# EAGLE board BLT_Preliminary_Avionics_Schematic_Brandon (EAGLE 9.6.2)
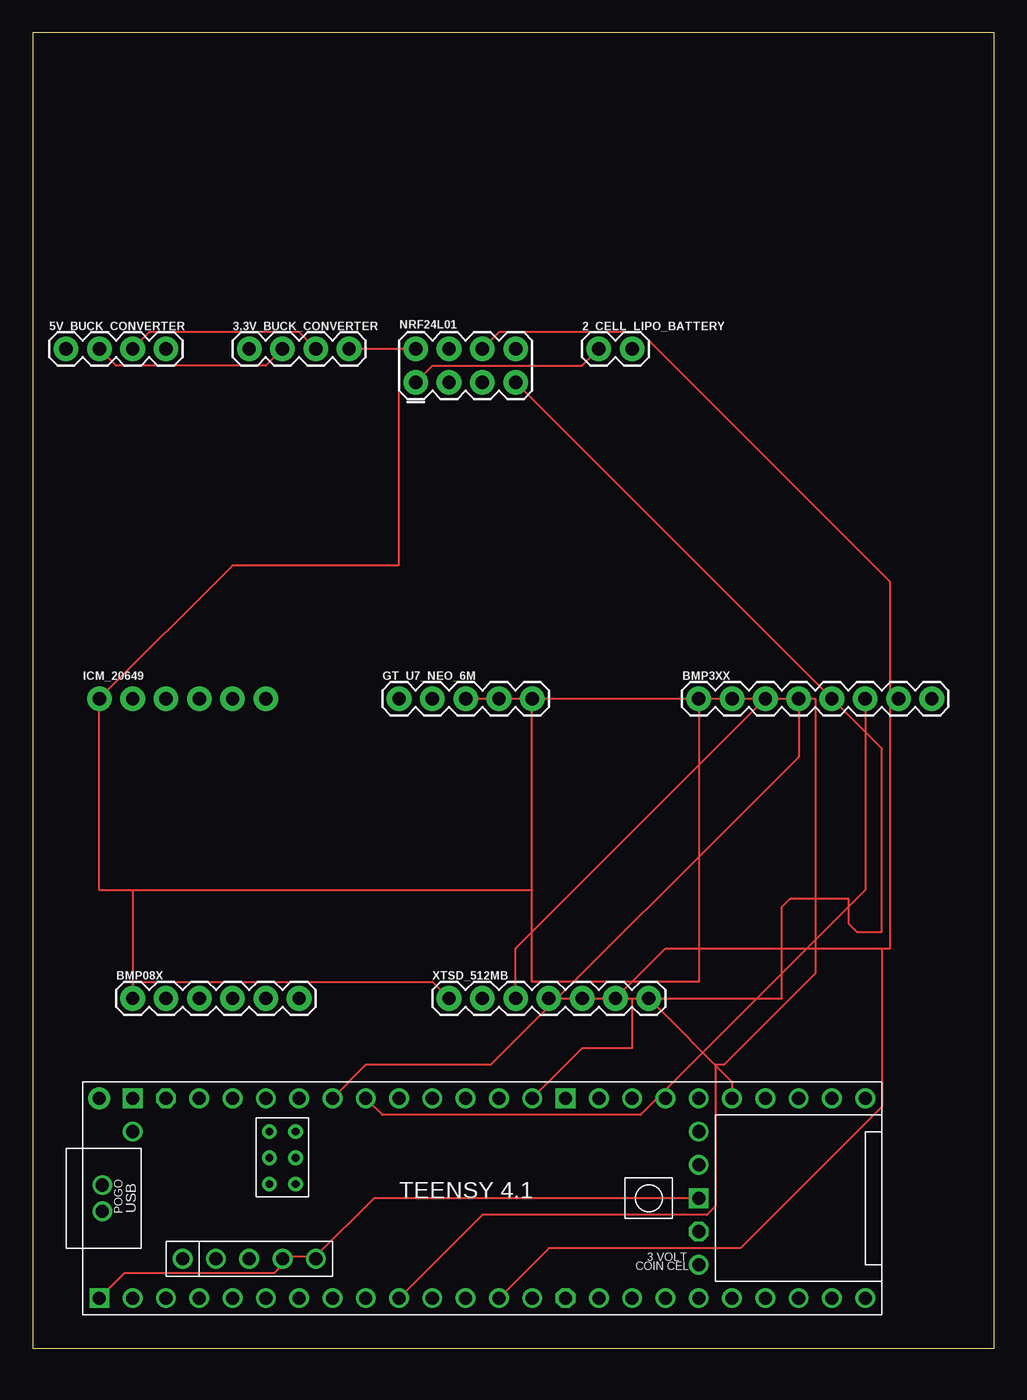
[diagram p0: board, top side]
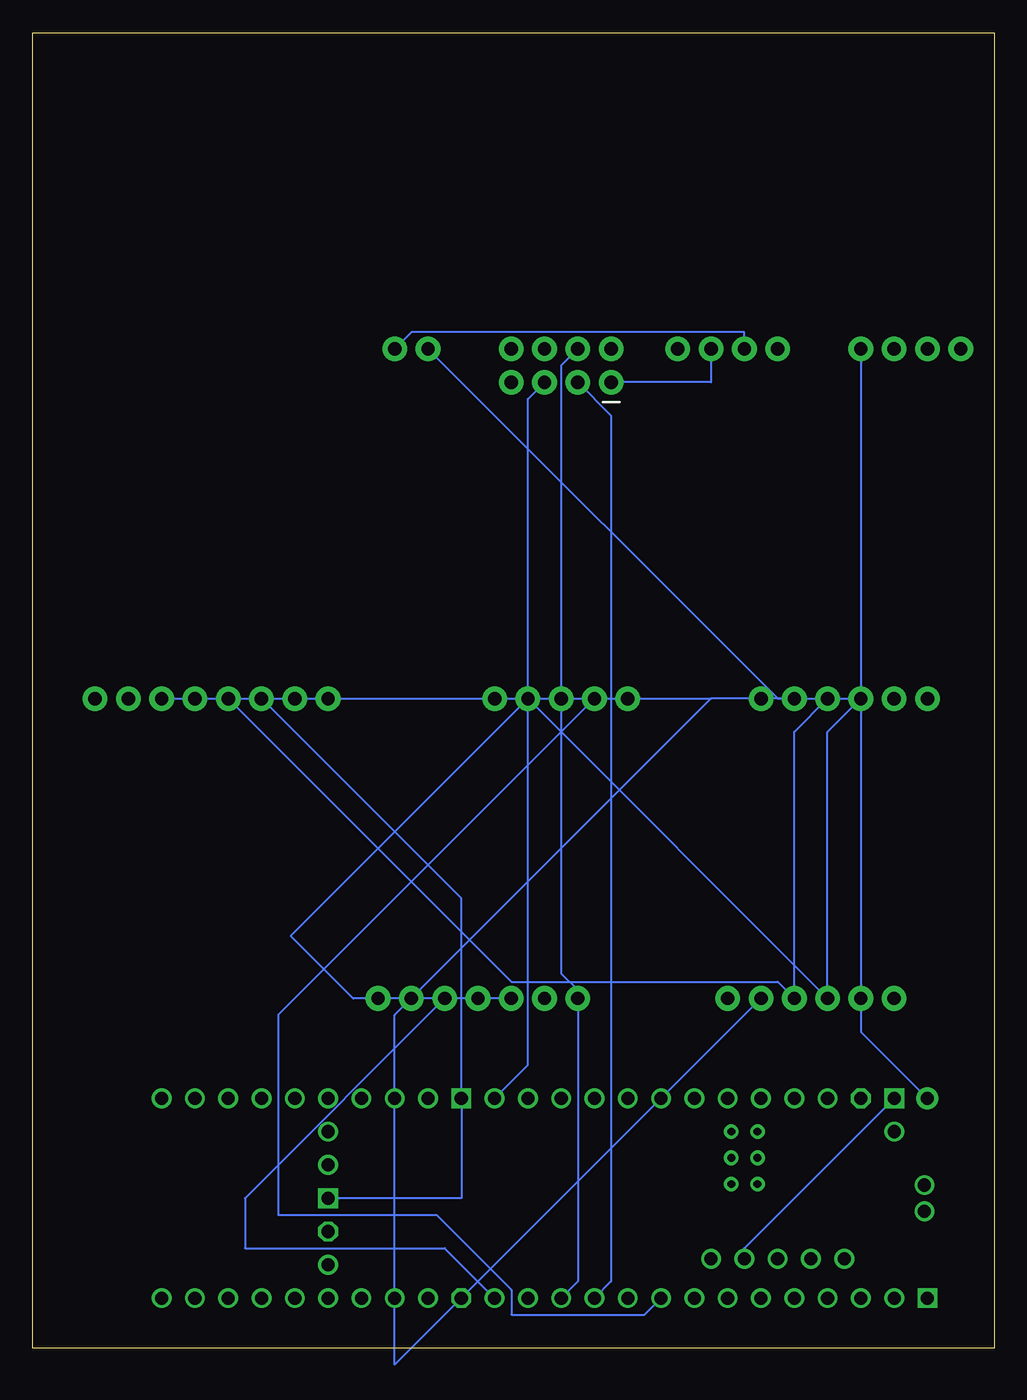
[diagram p1: board, bottom side, seen from below]

Size 73.33 x 100.32 mm. Coordinates in mm from the lower left corner, seen from the top.
Outline: 0,0 73.33,0 73.33,100.32 0,100.32 0,0
Copper layers (1*16): Top 0.035mm / dielectric 1.5mm / Bottom 0.035mm
Design rules "default": minimum track width 6mil, minimum drill 0.35mm, track to track 6mil, track to pad 6mil, pad to pad 6mil, via to via 6mil, smd to smd 6mil, copper to edge 40mil, drill to drill 6mil, minimum pad ring 10mil, minimum via ring 8mil, stop-mask expansion 4mil, vias tented up to drill 0mil, thermal gap 10mil

## Footprints (pad centres in the part's own frame; a part is rotated, then mirrored left to right if it is on the bottom)
1X02 = drill 1.016 pad 1.88: 1 0,0; 2 2.54,0
1X04 = drill 1.016 pad 1.88: 1 0,0; 2 2.54,0; 3 5.08,0; 4 7.62,0
1X08 = drill 1.016 pad 1.88: 1 0,0; 2 2.54,0; 3 5.08,0; 4 7.62,0; 5 10.16,0; 6 12.7,0; 7 15.24,0; 8 17.78,0
1X06 = drill 1.016 pad 1.88: 1 0,0; 2 2.54,0; 3 5.08,0; 4 7.62,0; 5 10.16,0; 6 12.7,0
1X05 = drill 1.016 pad 1.88: 1 0,0; 2 2.54,0; 3 5.08,0; 4 7.62,0; 5 10.16,0
1X06_NO_SILK = drill 1.016 pad 1.88: 1 0,0; 2 2.54,0; 3 5.08,0; 4 7.62,0; 5 10.16,0; 6 12.7,0
2X4 = drill 1.016 pad 1.88: 1 -3.81,-1.27; 2 -3.81,1.27; 3 -1.27,-1.27; 4 -1.27,1.27; 5 1.27,-1.27; 6 1.27,1.27; 7 3.81,-1.27; 8 3.81,1.27
TEENSY41 = drill 1: 0-RX1/CS1/CRX2 -27.94,-7.62; 1-TX1/MISO1/CTX2 -25.4,-7.62; 2-OUT2 -22.86,-7.62; 3-LRCLK2 -20.32,-7.62; 4-BCLK2 -17.78,-7.62; 5-IN2 -15.24,-7.62; 6-OUT1D -12.7,-7.62; 7-RX2/OUT1A -10.16,-7.62; 8-TX2/IN1 -7.62,-7.62; 9-OUT1C -5.08,-7.62; 10-CS\MQSR -2.54,-7.62; 11-MOSI/CTX1 0,-7.62; 12-MISO/MQSL 2.54,-7.62; 13-SCK/LED 2.54,7.62; 14-A0/TX3/SPDIF_OUT 0,7.62; 15-A1/RX3/SPDIF_IN -2.54,7.62; 16-A2/RX4/SCL1 -5.08,7.62; 17-A3/TX4/SDA1 -7.62,7.62; 18-A4/SDA0 -10.16,7.62; 19-A5/SCL0 -12.7,7.62; 20-A6/TX5/LRCLK1 -15.24,7.62; 21-A7/RX5/BCLK1 -17.78,7.62; 22-A8/CTX1 -20.32,7.62; 23-A9/CRX1/MCLK1 -22.86,7.62; 24-A10/TX6/SCL2 7.62,-7.62; 25-A11/RX6/SDA2 10.16,-7.62; 26-A12/MOSI1 12.7,-7.62; 27-A13/SCK1 15.24,-7.62; 28-RX7 17.78,-7.62; 29-TX7 20.32,-7.62; 30-CRX3 22.86,-7.62; 31-CTX3 25.4,-7.62; 32-OUT1B 27.94,-7.62; 33-MCLK2 27.94,7.62; 34-RX8 25.4,7.62; 35-TX8 22.86,7.62; 36-PWM 20.32,7.62; 37-PWM 17.78,7.62; 38-A14/CS/IN1 15.24,7.62; 39-A15/CS/OUT1A 12.7,7.62; 40-A16/CS1 10.16,7.62; 41-A17/MISO1 7.62,7.62; +5V -24.13,-4.62; D+ -30.25,-1; D- -30.25,1; DM -21.59,-4.62; DP -19.05,-4.62; GND4 -16.51,-4.62; GND5 -13.97,-4.62; ON/OFF 15.24,5.08; PROGRAM 15.24,2.54; VBAT 15.24,-5.08; VUSB -27.94,5.08 | drill 1 octagon: 3V3-1 5.08,-7.62; 3V3-2 15.24,-2.54; 3V3-3 -25.4,7.62 | drill 0.6: G -15.51,3.08; LED -17.51,3.08; R+ -17.51,5.08; R- -15.51,5.08; T+ -15.51,1.08; T- -17.51,1.08 | drill 1 square: GND1 -30.48,-7.62; GND2 15.24,0; GND3 5.08,7.62; GND6 -27.94,7.62 | drill 1 pad 1.676: VIN -30.48,7.62
1X07 = drill 1.016 pad 1.88: 1 0,0; 2 2.54,0; 3 5.08,0; 4 7.62,0; 5 10.16,0; 6 12.7,0; 7 15.24,0

## Placement (x,y rotation side)
2_CELL_LIPO_BATTERY  [1X02]  43.18,76.2 0 top
3.3V_BUCK_CONVERTER  [1X04]  16.51,76.2 0 top
5V_BUCK_CONVERTER  [1X04]  2.54,76.2 0 top
BMP3XX  [1X08]  50.8,49.53 0 top
BMP08X  [1X06]  7.62,26.67 0 top
GT_U7_NEO_6M  [1X05]  27.94,49.53 0 top
ICM_20649  [1X06_NO_SILK]  5.08,49.53 0 top
NRF24L01  [2X4]  33.02,74.93 0 top
U$1  TEENSY41  [TEENSY41]  35.56,11.43 0 top
XTSD_512MB  [1X07]  31.75,26.67 0 top

## Library data of the parts
2_CELL_LIPO_BATTERY GT_U7_NEO_6M ICM_20649 NRF24L01 XTSD_512MB = SparkFun-Connectors
3.3V_BUCK_CONVERTER 5V_BUCK_CONVERTER = SparkFun-Connectors; PROD_ID: CONN-09696
BMP3XX = SparkFun-Connectors; PROD_ID: CONN-08438
BMP08X = SparkFun-Connectors; PROD_ID: CONN-08437
U$1 = teensy

## Nets
3.3V: 3.3V_BUCK_CONVERTER.4 BMP3XX.1 BMP08X.1 GT_U7_NEO_6M.5 ICM_20649.1 NRF24L01.2 XTSD_512MB.1
5V: 5V_BUCK_CONVERTER.4 U$1.VIN
BAT+: 2_CELL_LIPO_BATTERY.2 3.3V_BUCK_CONVERTER.2 5V_BUCK_CONVERTER.2
CE: NRF24L01.3 U$1.9-OUT1C
CS: U$1.37-PWM XTSD_512MB.7
CSN: NRF24L01.4 U$1.10-CS\MQSR
GND: 2_CELL_LIPO_BATTERY.1 3.3V_BUCK_CONVERTER.3 5V_BUCK_CONVERTER.3 BMP3XX.3 BMP08X.3 GT_U7_NEO_6M.4 ICM_20649.3 NRF24L01.1 U$1.GND1 U$1.GND2 U$1.GND3 U$1.GND4 U$1.GND5 U$1.GND6 XTSD_512MB.3
MISO: NRF24L01.7 U$1.12-MISO/MQSL XTSD_512MB.5
MOSI: NRF24L01.6 U$1.11-MOSI/CTX1 XTSD_512MB.6
N$2: ICM_20649.2
N$3: BMP3XX.2
N$4: BMP08X.2
N$6: ICM_20649.6
N$7: BMP3XX.5
N$9: BMP3XX.7
N$10: BMP3XX.8
N$12: BMP08X.6
RX2: GT_U7_NEO_6M.2 U$1.7-RX2/OUT1A
SCK: NRF24L01.5 U$1.13-SCK/LED XTSD_512MB.4
SCL: BMP3XX.4 BMP08X.4 ICM_20649.4 U$1.19-A5/SCL0
SDA: BMP3XX.6 BMP08X.5 ICM_20649.5 U$1.18-A4/SDA0
TX2: GT_U7_NEO_6M.3 U$1.8-TX2/IN1

## Tracks (layer width: path | path; a pad name or v marks a point on that pad's centre or on a via)
3.3V
  Top 0.152: NRF24L01.2 27.94,76.2 | 27.94,76.2 3.3V_BUCK_CONVERTER.4 | 7.62,27.94 BMP08X.1 | BMP3XX.1 50.8,27.94 38.1,27.94 38.1,34.92 | 7.62,27.94 30.48,27.94 XTSD_512MB.1 | 38.1,34.92 GT_U7_NEO_6M.5 | 7.62,34.92 5.08,34.92 ICM_20649.1 15.24,59.69 27.94,59.69 27.94,76.2 | 7.62,34.92 38.1,34.92 | 7.62,34.92 7.62,27.94
5V
  Bottom 0.152: U$1.VIN 10.16,24.13 5V_BUCK_CONVERTER.4
BAT+
  Top 0.152: 5V_BUCK_CONVERTER.2 6.35,74.93 17.78,74.93 3.3V_BUCK_CONVERTER.2
  Bottom 0.152: 2_CELL_LIPO_BATTERY.2 44.45,77.47 19.05,77.47 3.3V_BUCK_CONVERTER.2
CE
  Bottom 0.152: U$1.9-OUT1C 29.21,5.08 29.21,71.12 NRF24L01.3
CS
  Top 0.152: U$1.37-PWM 53.34,20.32 XTSD_512MB.7
CSN
  Bottom 0.152: U$1.10-CS\MQSR 31.75,5.08 31.75,27.3 33.02,28.57 33.02,74.93 NRF24L01.4
GND
  Top 0.152: 5V_BUCK_CONVERTER.3 8.89,77.47 20.32,77.47 3.3V_BUCK_CONVERTER.3 | 2_CELL_LIPO_BATTERY.1 41.91,74.93 30.48,74.93 NRF24L01.1 | U$1.GND1 6.99,5.71 18.41,5.71 19.05,6.35 U$1.GND4 19.05,6.99 21.59,6.99 | XTSD_512MB.3 36.83,30.48 BMP3XX.3 | 21.59,6.99 26.04,11.43 U$1.GND2 | 21.59,6.99 U$1.GND5
  Bottom 0.152: NRF24L01.1 21.59,73.66 3.3V_BUCK_CONVERTER.3 | U$1.GND6 19.05,7.62 U$1.GND4 | U$1.GND2 40.64,11.43 U$1.GND3 40.64,34.29 BMP3XX.3 GT_U7_NEO_6M.4 | GT_U7_NEO_6M.4 BMP08X.3 12.7,46.99 ICM_20649.3 16.51,49.53 2_CELL_LIPO_BATTERY.1 | GT_U7_NEO_6M.4 53.66,31.43 48.9,26.67 XTSD_512MB.3
MISO
  Top 0.152: NRF24L01.7 64.77,45.72 64.77,31.75 62.87,31.75 62.23,32.38 62.23,34.29 57.78,34.29 57.15,33.66 57.15,26.67 XTSD_512MB.5
  Bottom 0.152: U$1.12-MISO/MQSL 41.91,7.62 57.15,7.62 57.15,11.43 XTSD_512MB.5
MOSI
  Top 0.152: U$1.11-MOSI/CTX1 39.37,7.62 53.98,7.62 64.77,18.41 64.77,30.48 | 64.77,30.48 48.26,30.48 XTSD_512MB.6 | NRF24L01.6 35.56,77.47 46.35,77.47 65.41,58.42 65.41,30.48 64.77,30.48
RX2
  Bottom 0.152: U$1.7-RX2/OUT1A 26.67,2.54 36.83,2.54 36.83,4.45 42.55,10.16 54.61,10.16 54.61,25.4 GT_U7_NEO_6M.2
SCK
  Top 0.152: U$1.13-SCK/LED 41.91,22.86 45.72,22.86 45.72,26.67 XTSD_512MB.4
  Bottom 0.152: NRF24L01.5 35.56,72.39 35.56,21.59 U$1.13-SCK/LED
SCL
  Top 0.152: U$1.19-A5/SCL0 25.4,21.59 34.92,21.59 58.42,45.09 BMP3XX.4
  Bottom 0.152: BMP3XX.4 36.83,27.94 16.51,27.94 BMP08X.4 15.24,46.99 ICM_20649.4
SDA
  Top 0.152: U$1.18-A4/SDA0 26.67,17.78 46.35,17.78 63.5,34.92 BMP3XX.6
  Bottom 0.152: BMP08X.5 45.72,-1.27 45.72,25.4 21.59,49.53 | BMP3XX.6 21.59,49.53 | ICM_20649.5 21.59,49.53
TX2
  Top 0.152: U$1.8-TX2/IN1 34.29,10.16 51.44,10.16 52.07,10.79 52.07,21.59 52.7,21.59 59.69,28.57 59.69,49.53 GT_U7_NEO_6M.3